# EAGLE board ID12-Breakout-v10 (EAGLE 4.16)
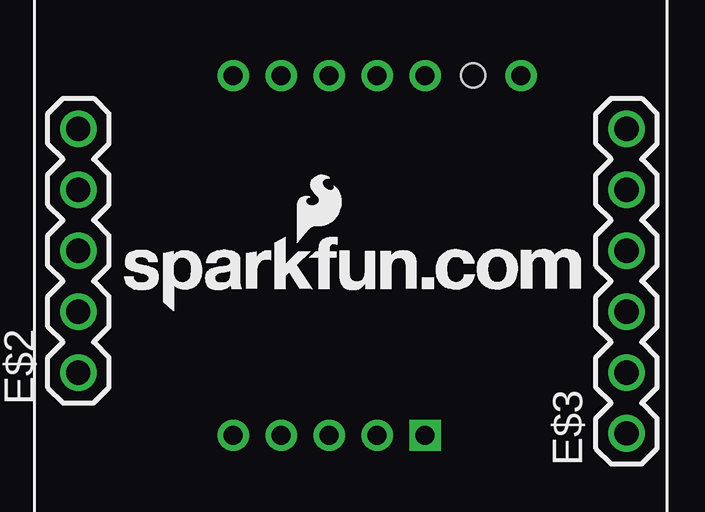
[diagram p0: board, top side]
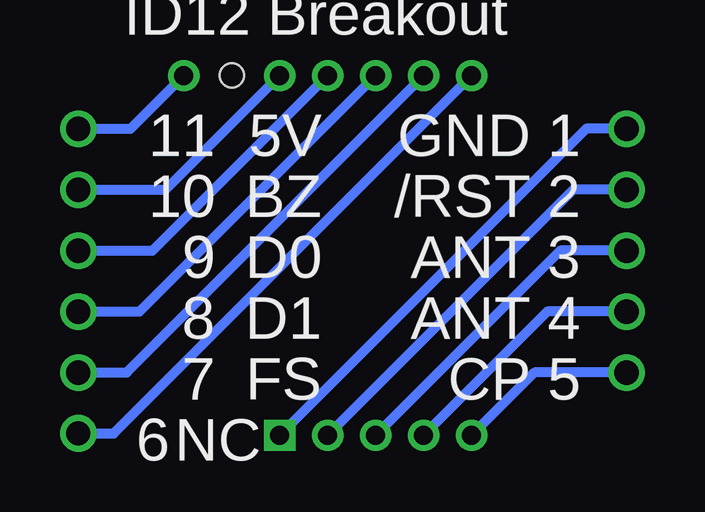
[diagram p1: board, bottom side, seen from below]

No outline drawn. Coordinates in mm, seen from the top.
Copper layers (1*16): Top 0.035mm / dielectric 1.5mm / Bottom 0.035mm
Design rules "default": minimum track width 10mil, minimum drill 24mil, track to track 8mil, track to pad 8mil, pad to pad 8mil, via to via 8mil, smd to smd 8mil, copper to edge 40mil, drill to drill 8mil, minimum pad ring 10mil, minimum via ring 8mil, stop-mask expansion 4mil, vias tented up to drill 0mil, thermal gap 10mil
Holes 1 mm at 19,20

## Footprints (pad centres in the part's own frame; a part is rotated, then mirrored left to right if it is on the bottom)
ID12_PACKAGE = drill 0.8 square: P$1 8,-15 | drill 0.8 round: P$2 6,-15; P$3 4,-15; P$4 2,-15; P$5 0,-15; P$6 0,0; P$7 2,0; P$8 4,0; P$9 6,0; P$10 8,0; P$11 12,0
1X05 = drill 1.016 round: 1 0,0; 2 2.54,0; 3 5.08,0; 4 7.62,0; 5 10.16,0
1X06 = drill 1.016 round: 1 0,0; 2 2.54,0; 3 5.08,0; 4 7.62,0; 5 10.16,0; 6 12.7,0

## Placement (x,y rotation side)
E$1  [ID12_PACKAGE]  9,20 0 top
E$2  [1X05]  2.54,7.62 90 top
E$3  [1X06]  25.4,5.08 90 top
E$4  [SFE-NEW-WEBLOGO]  4.45,10.16 0 top

## Library data of the parts
E$1 = ID12
E$2-E$4 = SparkFun

## Nets
S$1: E$1.P$11 E$3.6
S$2: E$1.P$10 E$3.5
S$3: E$1.P$9 E$3.4
S$4: E$1.P$8 E$3.3
S$5: E$1.P$7 E$3.2
S$6: E$1.P$6 E$3.1
S$7: E$1.P$1 E$2.5
S$8: E$1.P$2 E$2.4
S$9: E$1.P$3 E$2.3
S$10: E$1.P$4 E$2.2
S$11: E$1.P$5 E$2.1

## Tracks (layer width: path | path; a pad name or v marks a point on that pad's centre or on a via)
S$1
  Bottom 0.406: E$3.6 23.22,17.78 E$1.P$11
S$2
  Bottom 0.406: E$3.5 21.76,15.24 E$1.P$10
S$3
  Bottom 0.406: E$3.4 22.3,12.7 E$1.P$9
S$4
  Bottom 0.406: E$3.3 22.84,10.16 E$1.P$8
S$5
  Bottom 0.406: E$3.2 23.38,7.62 E$1.P$7
S$6
  Bottom 0.406: E$3.1 23.92,5.08 E$1.P$6
S$7
  Bottom 0.406: E$2.5 4.22,17.78 E$1.P$1
S$8
  Bottom 0.406: E$2.4 4.76,15.24 E$1.P$2
S$9
  Bottom 0.406: E$2.3 5.3,12.7 E$1.P$3
S$10
  Bottom 0.406: E$2.2 5.84,10.16 E$1.P$4
S$11
  Bottom 0.406: E$2.1 6.38,7.62 E$1.P$5

## Text on the board
bPlace: ID12 Breakout | GND 1 | 5V | 11 | /RST 2 | BZ | 10 | ANT 3 | D0 | 9 | ANT 4 | D1 | 8 | CP 5 | FS | 7 | NC | 6